# EAGLE board Flappy bird Console (EAGLE 8.7.1)
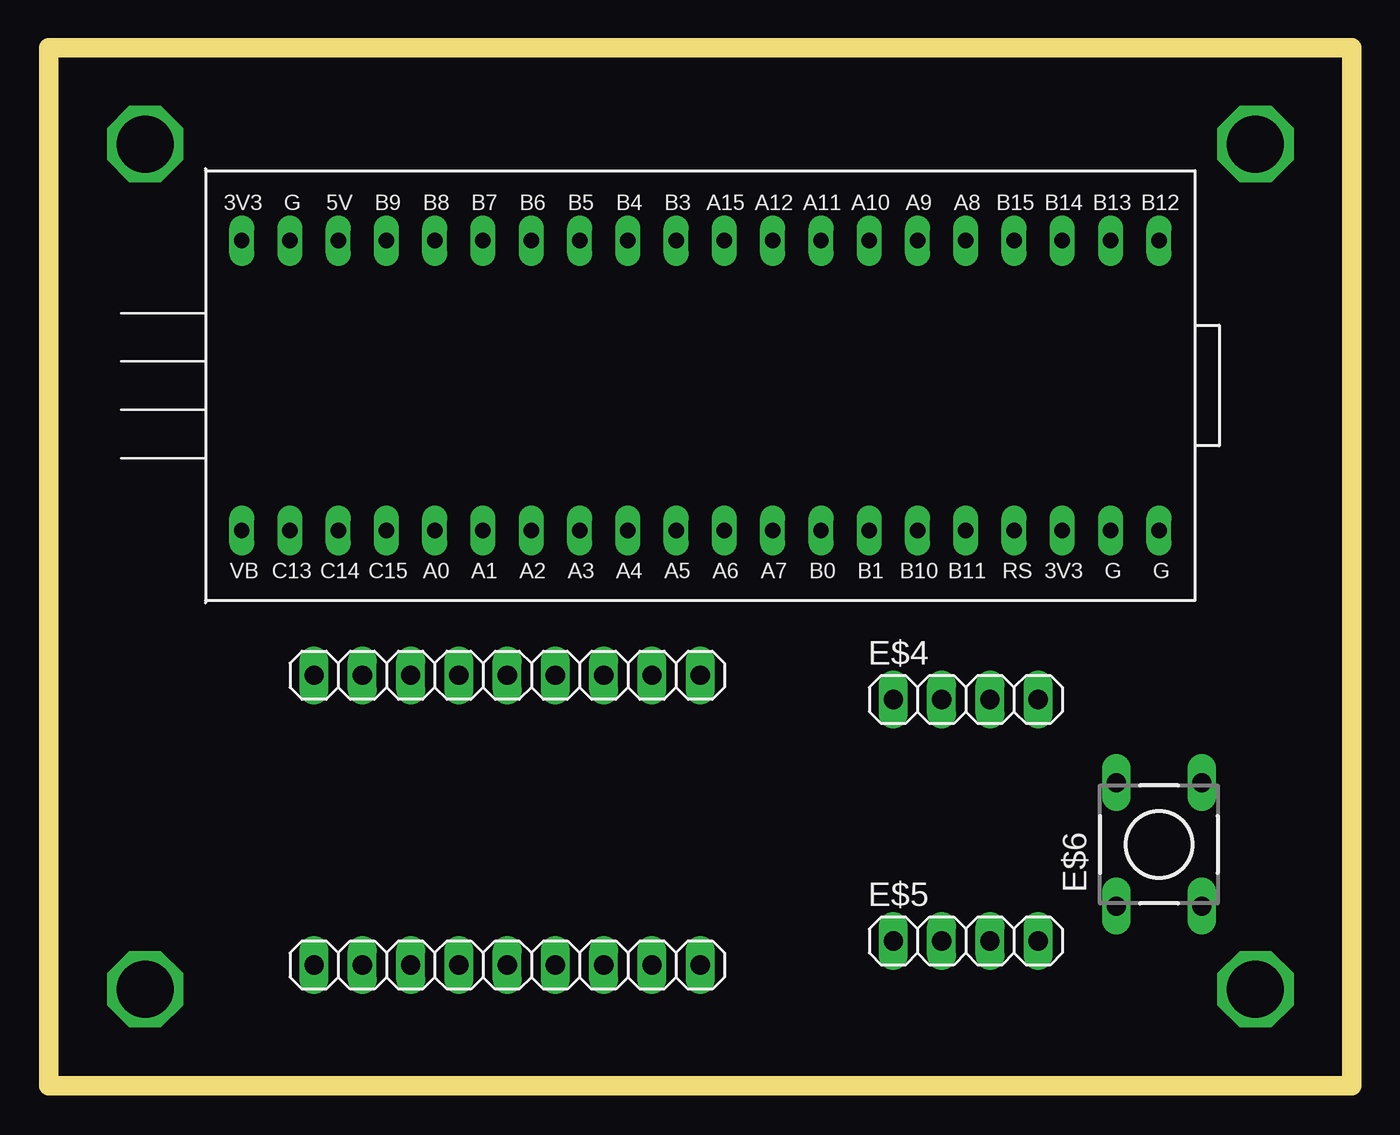
[diagram p0: board, top side]
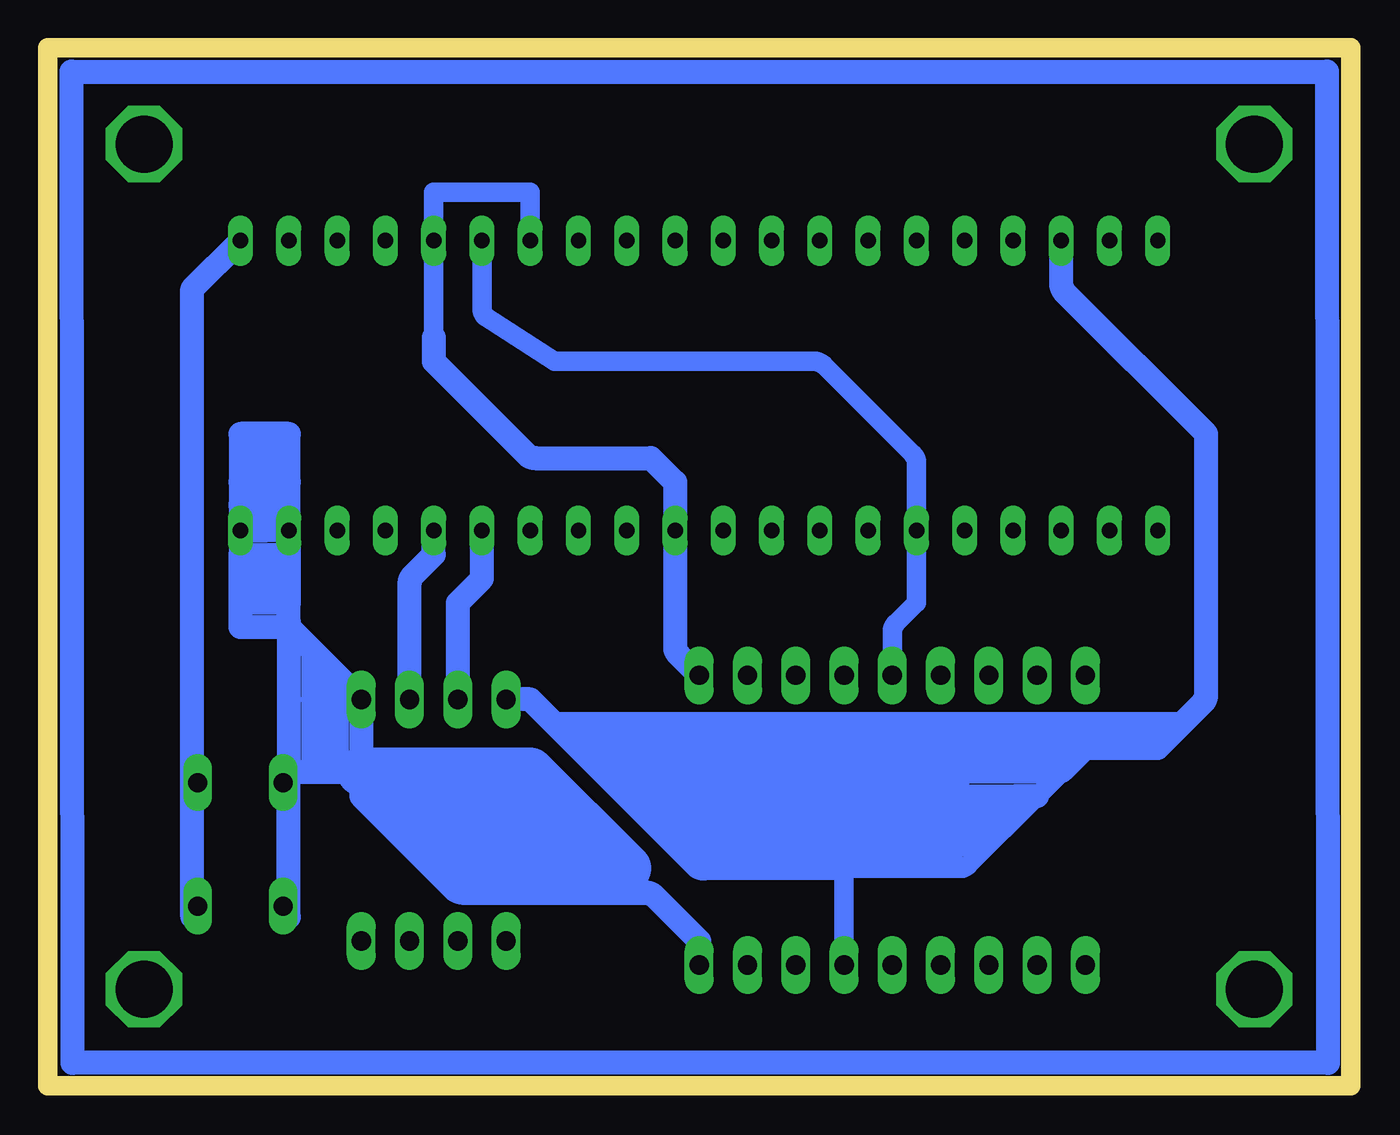
[diagram p1: board, bottom side, seen from below]

Size 68.58 x 54.61 mm. Coordinates in mm from the lower left corner, seen from the top.
Outline: 0,54.61 0,0 68.58,0 68.58,54.61 0,54.61
Copper layers (1*16): Top 0.035mm / dielectric 1.5mm / Bottom 0.035mm
Design rules "default": minimum track width 6mil, minimum drill 0.35mm, track to track 6mil, track to pad 6mil, pad to pad 6mil, via to via 6mil, smd to smd 6mil, copper to edge 40mil, drill to drill 6mil, minimum pad ring 10mil, minimum via ring 8mil, stop-mask expansion 4mil, vias tented up to drill 0mil, thermal gap 10mil

## Footprints (pad centres in the part's own frame; a part is rotated, then mirrored left to right if it is on the bottom)
1X09 = drill 1.016 long: 1 -10.16,0; 2 -7.62,0; 3 -5.08,0; 4 -2.54,0; 5 0,0; 6 2.54,0; 7 5.08,0; 8 7.62,0; 9 10.16,0
DIL40 = drill 0.813 long: 1 -24.13,-7.62; 2 -21.59,-7.62; 3 -19.05,-7.62; 4 -16.51,-7.62; 5 -13.97,-7.62; 6 -11.43,-7.62; 7 -8.89,-7.62; 8 -6.35,-7.62; 9 -3.81,-7.62; 10 -1.27,-7.62; 11 1.27,-7.62; 12 3.81,-7.62; 13 6.35,-7.62; 14 8.89,-7.62; 15 11.43,-7.62; 16 13.97,-7.62; 17 16.51,-7.62; 18 19.05,-7.62; 19 21.59,-7.62; 20 24.13,-7.62; 21 24.13,7.62; 22 21.59,7.62; 23 19.05,7.62; 24 16.51,7.62; 25 13.97,7.62; 26 11.43,7.62; 27 8.89,7.62; 28 6.35,7.62; 29 3.81,7.62; 30 1.27,7.62; 31 -1.27,7.62; 32 -3.81,7.62; 33 -6.35,7.62; 34 -8.89,7.62; 35 -11.43,7.62; 36 -13.97,7.62; 37 -16.51,7.62; 38 -19.05,7.62; 39 -21.59,7.62; 40 -24.13,7.62
1X04 = drill 1.016 long: 1 -3.81,0; 2 -1.27,0; 3 1.27,0; 4 3.81,0
DTS-6 = drill 1 long: 1 -3.25,2.25; 2 3.25,2.25; 3 -3.25,-2.25; 4 3.25,-2.25

## Placement (x,y rotation side)
E$1  [1X09]  24.13,21.59 0 top
E$2  [1X09]  24.13,6.35 0 top
E$3  [DIL40]  34.29,36.83 0 top
E$4  [1X04]  48.26,20.32 0 top
E$5  [1X04]  48.26,7.62 0 top
E$6  [DTS-6]  58.42,12.7 90 top

## Library data of the parts
E$1 E$2 E$4 E$5 = pinhead
E$3 = STM32BluePill1
E$6 = switch-tact

## Nets
S$1: E$1.5 E$3.26
S$2: E$3.27
S$4: E$3.15 E$4.2
S$5: E$3.16 E$4.3
S$6: E$2.6 E$3.38 E$4.1
S$7: E$3.19 E$3.20 E$4.4
S$11: E$3.21

## Tracks (layer width: path | path; a pad name or v marks a point on that pad's centre or on a via)
S$1
  Bottom 1.016: E$1.5 24.13,23.87 arc45 23.94,24.32 22.86,25.4 22.86,32.76 arc-45 23.05,33.21 27.75,37.91 arc-45 28.2,38.1 41.91,38.1 45.53,40.45 arc45 45.72,40.9 E$3.26
S$2
  Bottom 1.016: E$3.27 43.18,46.99 48.26,46.99 48.26,39.37
  Bottom 1.27: 48.26,39.37 48.26,38.1 43.37,33.21 arc-45 42.92,33.02 36.83,33.02 35.56,31.75 35.56,23.12 arc-45 35.37,22.67 34.29,21.59
S$3
  Bottom 1.27: 1.27,53.34 1.21,1.2 67.25,1.2 67.31,53.34 1.27,53.34
S$4
  Bottom 1.27: E$4.2 46.99,25.4 45.72,26.67 E$3.15
S$5
  Bottom 1.27: E$4.3 49.53,26.41 arc45 49.34,26.86 48.26,27.94 E$3.16
S$6
  Bottom 1.016: 26.67,11.43 20.58,11.43 arc-45 20.13,11.62 16.51,15.24 13.97,17.78 | E$2.6 26.67,11.17 arc45 26.48,11.62 25.4,12.7
  Bottom 1.27: 26.67,11.43 34.03,11.43 arc45 34.48,11.62 41.91,19.05 | 41.91,19.05 43.18,20.32 E$4.1 | 25.4,12.7 22.86,15.24 | 22.86,15.24 20.51,17.59 arc45 20.06,17.78 13.97,17.78 | 13.97,17.78 10.16,17.78 8.89,19.05 | 8.89,19.05 7.81,20.13 arc-45 7.62,20.58 7.62,34.29 15.05,41.72 arc45 15.24,42.17 E$3.38 | 13.97,17.78 15.05,16.7 arc45 15.5,16.51 20.32,16.51 21.59,15.24 17.52,15.24 | 16.51,15.24 17.52,15.24 | 17.52,15.24 arc-45 17.97,15.05 19.05,13.97 21.33,13.97 arc45 21.78,14.16 22.86,15.24 | 22.86,15.24 22.86,13.97 24.13,12.7 | 24.13,12.7 20.32,12.7 19.82,13.2 arc-45 19.7,13.5 23.39,13.5 arc-45 23.84,13.31 24.65,12.5 arc-45 24.22,12.32 21,12.32 | 41.91,19.05 8.89,19.05 | 24.13,12.7 24.5,12.7 arc-45 24.95,12.51 25.4,12.07
S$7
  Bottom 1.016: 55.88,33.02 55.88,34.29 | 58.42,34.29 58.42,32.76 | 58.42,31.75 58.42,32.76 | 58.42,32.76 arc45 58.23,33.21 57.15,34.29 56.07,33.21 | 57.15,31.75 55.88,31.75
  Bottom 1.27: E$3.19 55.88,31.75 55.88,34.29 57.15,34.29 58.42,34.29 58.42,31.75 | 57.15,33.02 58.42,31.75 | 58.42,31.75 E$3.20 57.15,29.21 | E$3.19 57.15,29.21 | 57.15,29.21 57.15,31.75 | 53.34,21.59 E$4.4 52.07,16.51 52.07,15.24 47.18,10.35 arc-45 46.73,10.16 37.09,10.16 arc45 36.64,9.97 34.29,7.62 34.29,6.35 | 53.34,21.59 54.61,22.86 | 54.61,22.86 55.69,23.94 arc45 55.88,24.39 | 55.88,24.39 55.88,25.4 | E$3.19 55.88,27.94 | 55.88,24.39 55.88,24.13 | 55.88,24.13 58.42,24.13 58.42,25.4 | 58.42,26.67 58.42,27.94 | 58.42,27.94 55.88,27.94 | 55.88,27.94 55.88,26.67 | 55.88,26.67 55.88,25.4 | 55.88,25.4 58.42,25.4 | 58.42,25.4 58.42,26.67 | 58.42,26.67 55.88,26.67 | 58.42,31.75 57.73,31.75 arc-45 57.28,31.94 | 57.28,31.94 56.56,32.65 | 57.28,31.94 58.23,30.98 arc-45 58.42,30.53 58.42,27.94 | 55.88,8.89 55.88,16.51 | 55.88,16.51 54.61,16.51 | 55.88,24.13 55.88,16.51 | 54.61,22.86 54.61,20.32 | 54.61,20.32 54.61,16.51 | 54.61,16.51 53.34,16.51 53.34,21.59 | 53.34,21.59 54.61,20.32
  Bottom 2.54: 52.07,16.51 43.18,16.51 38.1,11.43 46.99,11.43 50.8,15.24 43.18,15.24 42.1,14.16 arc45 41.91,13.71 41.91,12.7 45.46,12.7 arc45 45.91,12.89 46.99,13.97
S$9
  Bottom 1.27: 20.32,17.78 39.37,17.78
  Bottom 2.54: 39.37,17.78 38.1,16.51 | 36.83,15.24 38.1,16.51 | 38.1,16.51 22.86,16.51 25.21,14.16 arc45 25.66,13.97 35.56,13.97 34.29,12.7 26.67,12.7
S$11
  Bottom 1.27: 60.96,8.89 60.96,41.91 E$3.21
S$12  (via drill 3 pad 4)
  other vias: 5.08,49.53
S$13  (via drill 3 pad 4)
  other vias: 63.5,49.53
S$14  (via drill 3 pad 4)
  other vias: 63.5,5.08
S$15  (via drill 3 pad 4)
  other vias: 5.08,5.08

## Text on the board
tTest: STM32f103 | RX | TX | VCC | 5V | RX | TX | GND | FTDI | GY-25 | 5V | G